# EAGLE board usb-hub-v0.2-panelize (EAGLE 6.4)
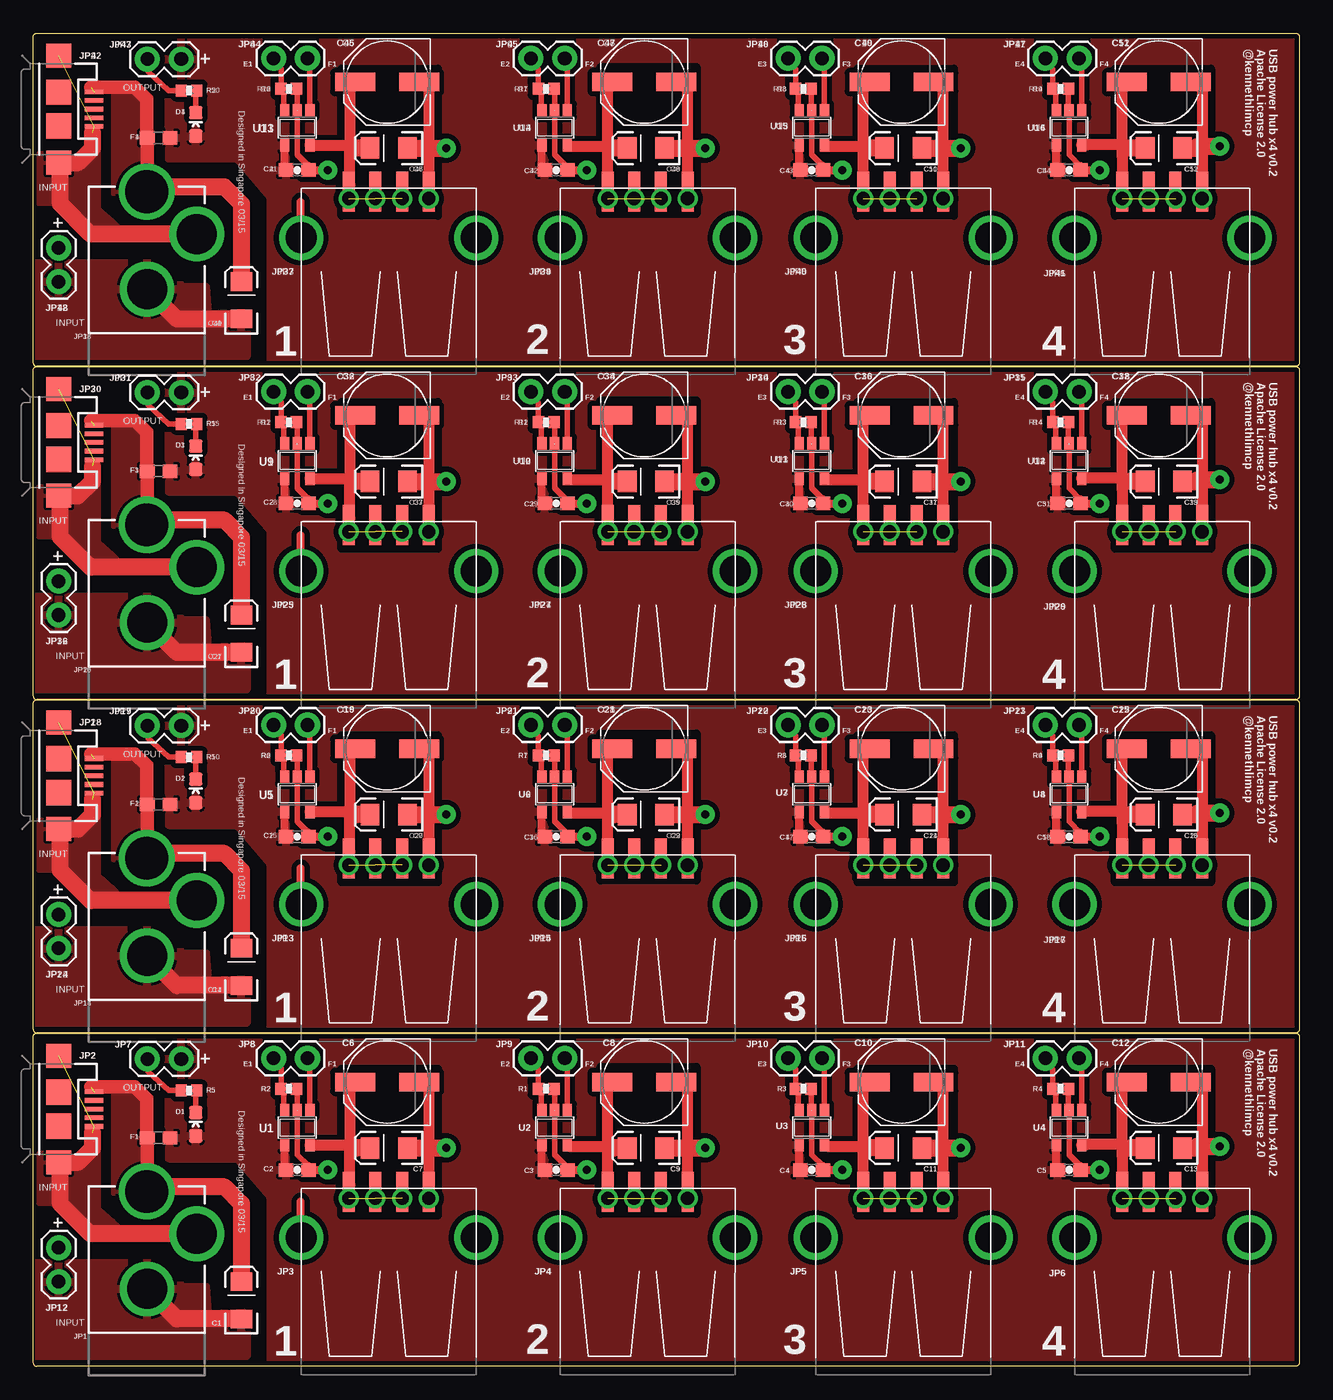
[diagram p0: board, top side]
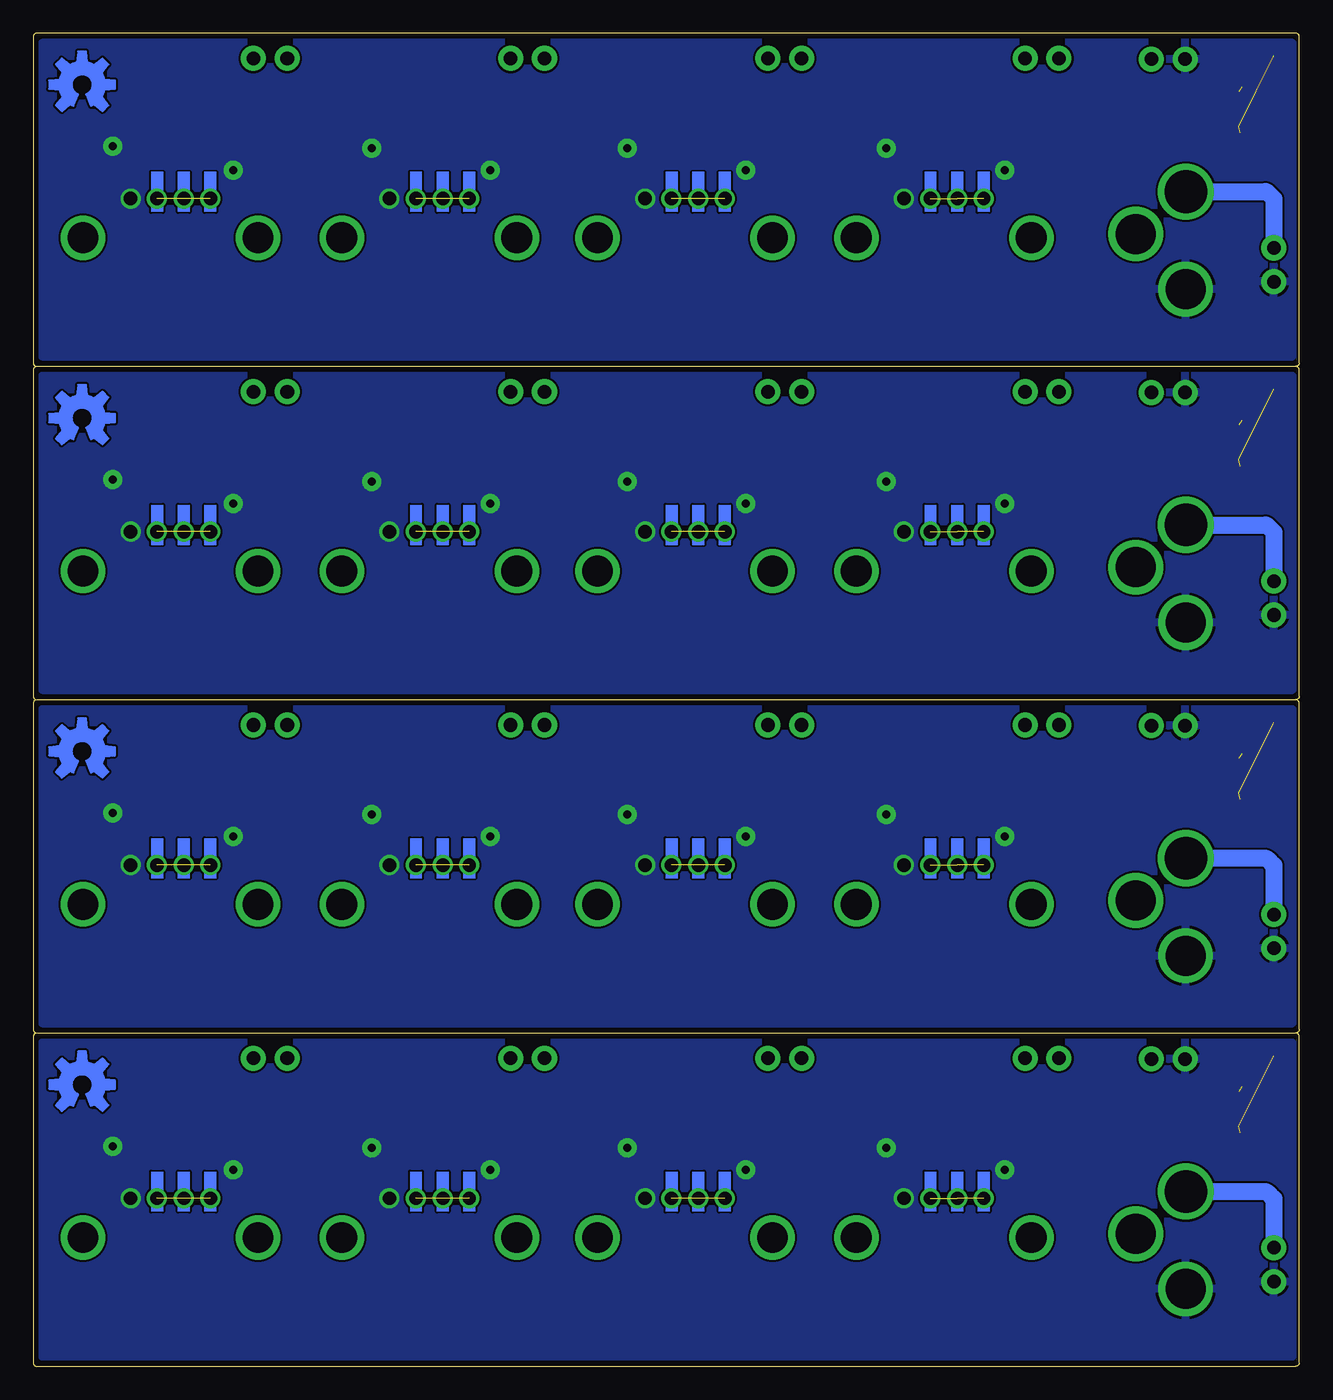
[diagram p1: board, bottom side, seen from below]

Size 95 x 100.06 mm. Coordinates in mm from the lower left corner, seen from the top.
Outline: 0,0.25 0,24.75 arc-90 0.25,25 94.75,25 arc-90 95,24.75 95,0.25 arc-90 94.75,0 0.25,0 arc-90 0,0.25
Outline: 0,25.27 0,49.77 arc-90 0.25,50.02 94.75,50.02 arc-90 95,49.77 95,25.27 arc-90 94.75,25.02 0.25,25.02 arc-90 0,25.27
Outline: 0,50.29 0,74.78 arc-90 0.25,75.04 94.75,75.04 arc-90 95,74.78 95,50.29 arc-90 94.75,50.04 0.25,50.04 arc-90 0,50.29
Outline: 0,75.31 0,99.8 arc-90 0.25,100.06 94.75,100.06 arc-90 95,99.8 95,75.31 arc-90 94.75,75.06 0.25,75.06 arc-90 0,75.31
Copper layers (1+2*15+16): Top 0.018mm / dielectric 0.195mm / Route2 0.035mm / dielectric 1.1mm / Route15 0.035mm / dielectric 0.195mm / Bottom 0.018mm
Design rules "spark-4layer": minimum track width 6mil, minimum drill 0.3mm, track to track 6mil, track to pad 6mil, pad to pad 6mil, via to via 6mil, smd to smd 6mil, copper to edge 6mil, drill to drill 6mil, minimum pad ring 12mil, minimum via ring 8mil, stop-mask expansion 4mil, vias tented up to drill 20mil, thermal gap 8mil

## Footprints (pad centres in the part's own frame; a part is rotated, then mirrored left to right if it is on the bottom)
EIA3216 = smd 1.4 x 1.6: A 1.4,0; C -1.4,0
0603-CAP = smd 1.1 x 1: 1 -0.85,0; 2 0.85,0
PANASONIC_D = smd 3 x 1.4: + 2.4,0; - -2.4,0
LED-0603 = smd 1 x 1: A 0,-0.877; C 0,0.877
0603 = smd 1.1 x 1: 1 -0.85,0; 2 0.85,0
POWER_JACK_PTH_LOCK = drill 2.997 pad 4.115: GND 0.025,6.557; GNDBREAK 3.762,10.7 | drill 3.2 pad 4.115: PWR 0,13.878
USB-MICROB = smd 0.35 x 1.4: D+ 0,2.65; D- -0.65,2.65; GND 1.3,2.65; ID 0.65,2.65; VBUS -1.3,2.65 | smd 1.8 x 1.9: MT1 -4,0; MT2 4,0 | smd 1.9 x 1.9: P$1 -1.27,0; P$2 1.27,0
USB-A-S = smd 3 x 0.9: D+ 3.45,-1; D- 3.45,1; GND 3.45,-3; VBUS 3.45,3 | drill 2.311: P$5 0,-6.566; P$6 0,6.566
1X02 = drill 1.016 pad 1.88: 1 0,0; 2 2.54,0
0402-RES = smd 0.85 x 0.9: 1 -0.58,0; 2 0.58,0
SOT23-5 = smd 0.69 x 0.99: 1 -0.95,-1.29; 2 0,-1.29; 3 0.95,-1.29; 4 0.95,1.3; 5 -0.95,1.3

## Placement (x,y rotation side)
C1  10uF  [EIA3216]  15.62,4.95 90 top
C2  1.0uF  [0603-CAP]  19.81,14.73 0 top
C3  1.0uF  [0603-CAP]  39.24,14.73 0 top
C4  1.0uF  [0603-CAP]  58.42,14.73 0 top
C5  1.0uF  [0603-CAP]  77.72,14.73 0 top
C6  150uF  [PANASONIC_D]  26.54,21.34 180 top
C7  10uF  [EIA3216]  26.67,16.38 180 top
C8  150uF  [PANASONIC_D]  45.85,21.34 180 top
C9  10uF  [EIA3216]  45.97,16.38 180 top
C10  150uF  [PANASONIC_D]  65.15,21.34 180 top
C11  10uF  [EIA3216]  65.28,16.38 180 top
C12  150uF  [PANASONIC_D]  84.45,21.34 180 top
C13  10uF  [EIA3216]  84.84,16.38 180 top
C14  10uF  [EIA3216]  15.62,29.97 90 top
C15  1.0uF  [0603-CAP]  19.81,39.75 0 top
C16  1.0uF  [0603-CAP]  39.24,39.75 0 top
C17  1.0uF  [0603-CAP]  58.42,39.75 0 top
C18  1.0uF  [0603-CAP]  77.72,39.75 0 top
C19  150uF  [PANASONIC_D]  26.54,46.35 180 top
C20  10uF  [EIA3216]  26.67,41.4 180 top
C21  150uF  [PANASONIC_D]  45.85,46.35 180 top
C22  10uF  [EIA3216]  45.97,41.4 180 top
C23  150uF  [PANASONIC_D]  65.15,46.35 180 top
C24  10uF  [EIA3216]  65.28,41.4 180 top
C25  150uF  [PANASONIC_D]  84.45,46.35 180 top
C26  10uF  [EIA3216]  84.84,41.4 180 top
C27  10uF  [EIA3216]  15.62,54.99 90 top
C28  1.0uF  [0603-CAP]  19.81,64.77 0 top
C29  1.0uF  [0603-CAP]  39.24,64.77 0 top
C30  1.0uF  [0603-CAP]  58.42,64.77 0 top
C31  1.0uF  [0603-CAP]  77.72,64.77 0 top
C32  150uF  [PANASONIC_D]  26.54,71.37 180 top
C33  10uF  [EIA3216]  26.67,66.42 180 top
C34  150uF  [PANASONIC_D]  45.85,71.37 180 top
C35  10uF  [EIA3216]  45.97,66.42 180 top
C36  150uF  [PANASONIC_D]  65.15,71.37 180 top
C37  10uF  [EIA3216]  65.28,66.42 180 top
C38  150uF  [PANASONIC_D]  84.45,71.37 180 top
C39  10uF  [EIA3216]  84.84,66.42 180 top
C40  10uF  [EIA3216]  15.62,80.01 90 top
C41  1.0uF  [0603-CAP]  19.81,89.79 0 top
C42  1.0uF  [0603-CAP]  39.24,89.79 0 top
C43  1.0uF  [0603-CAP]  58.42,89.79 0 top
C44  1.0uF  [0603-CAP]  77.72,89.79 0 top
C45  150uF  [PANASONIC_D]  26.54,96.39 180 top
C46  10uF  [EIA3216]  26.67,91.44 180 top
C47  150uF  [PANASONIC_D]  45.85,96.39 180 top
C48  10uF  [EIA3216]  45.97,91.44 180 top
C49  150uF  [PANASONIC_D]  65.15,96.39 180 top
C50  10uF  [EIA3216]  65.28,91.44 180 top
C51  150uF  [PANASONIC_D]  84.45,96.39 180 top
C52  10uF  [EIA3216]  84.84,91.44 180 top
D1  RED  [LED-0603]  12.19,18.16 0 top
D2  RED  [LED-0603]  12.19,43.18 0 top
D3  RED  [LED-0603]  12.19,68.2 0 top
D4  RED  [LED-0603]  12.19,93.22 0 top
F1  PTC0603  [0603]  9.4,17.14 0 top
F2  PTC0603  [0603]  9.4,42.16 0 top
F3  PTC0603  [0603]  9.4,67.18 0 top
F4  PTC0603  [0603]  9.4,92.2 0 top
JP1  POWER_JACKPTH_LOCK  [POWER_JACK_PTH_LOCK]  8.51,-0.76 0 top
JP2  USB-MICROB  [USB-MICROB]  1.91,19.3 270 top
JP3  USB-A-S  [USB-A-S]  26.67,9.65 90 top
JP4  USB-A-S  [USB-A-S]  46.1,9.65 90 top
JP5  USB-A-S  [USB-A-S]  65.28,9.65 90 top
JP6  USB-A-S  [USB-A-S]  84.71,9.65 90 top
JP7  [1X02]  11.1,23.06 180 top
JP8  [1X02]  18.03,23.11 0 top
JP9  [1X02]  37.34,23.11 0 top
JP10  [1X02]  56.64,23.11 0 top
JP11  [1X02]  75.95,23.11 0 top
JP12  [1X02]  1.91,8.89 270 top
JP13  USB-A-S  [USB-A-S]  26.67,34.67 90 top
JP14  POWER_JACKPTH_LOCK  [POWER_JACK_PTH_LOCK]  8.51,24.26 0 top
JP15  USB-A-S  [USB-A-S]  46.1,34.67 90 top
JP16  USB-A-S  [USB-A-S]  65.28,34.67 90 top
JP17  USB-A-S  [USB-A-S]  84.71,34.67 90 top
JP18  USB-MICROB  [USB-MICROB]  1.91,44.32 270 top
JP19  [1X02]  11.1,48.08 180 top
JP20  [1X02]  18.03,48.13 0 top
JP21  [1X02]  37.34,48.13 0 top
JP22  [1X02]  56.64,48.13 0 top
JP23  [1X02]  75.95,48.13 0 top
JP24  [1X02]  1.91,33.91 270 top
JP25  USB-A-S  [USB-A-S]  26.67,59.69 90 top
JP26  POWER_JACKPTH_LOCK  [POWER_JACK_PTH_LOCK]  8.51,49.28 0 top
JP27  USB-A-S  [USB-A-S]  46.1,59.69 90 top
JP28  USB-A-S  [USB-A-S]  65.28,59.69 90 top
JP29  USB-A-S  [USB-A-S]  84.71,59.69 90 top
JP30  USB-MICROB  [USB-MICROB]  1.91,69.34 270 top
JP31  [1X02]  11.1,73.1 180 top
JP32  [1X02]  18.03,73.15 0 top
JP33  [1X02]  37.34,73.15 0 top
JP34  [1X02]  56.64,73.15 0 top
JP35  [1X02]  75.95,73.15 0 top
JP36  [1X02]  1.91,58.93 270 top
JP37  USB-A-S  [USB-A-S]  26.67,84.71 90 top
JP38  POWER_JACKPTH_LOCK  [POWER_JACK_PTH_LOCK]  8.51,74.3 0 top
JP39  USB-A-S  [USB-A-S]  46.1,84.71 90 top
JP40  USB-A-S  [USB-A-S]  65.28,84.71 90 top
JP41  USB-A-S  [USB-A-S]  84.71,84.71 90 top
JP42  USB-MICROB  [USB-MICROB]  1.91,94.36 270 top
JP43  [1X02]  11.1,98.12 180 top
JP44  [1X02]  18.03,98.17 0 top
JP45  [1X02]  37.34,98.17 0 top
JP46  [1X02]  56.64,98.17 0 top
JP47  [1X02]  75.95,98.17 0 top
JP48  [1X02]  1.91,83.95 270 top
LOGO1  OSHW-LOGOPAD  [OSHW-LOGO-M-PAD]  91.34,21.14 0 bottom
LOGO2  OSHW-LOGOPAD  [OSHW-LOGO-M-PAD]  91.34,46.16 0 bottom
LOGO3  OSHW-LOGOPAD  [OSHW-LOGO-M-PAD]  91.34,71.17 0 bottom
LOGO4  OSHW-LOGOPAD  [OSHW-LOGO-M-PAD]  91.34,96.19 0 bottom
R1  10K  [0402-RES]  38.48,20.83 180 top
R2  10K  [0402-RES]  19.18,20.83 180 top
R3  10K  [0402-RES]  57.78,20.83 180 top
R4  10K  [0402-RES]  77.09,20.83 180 top
R5  [0402-RES]  11.68,20.7 0 top
R6  10K  [0402-RES]  19.18,45.85 180 top
R7  10K  [0402-RES]  38.48,45.85 180 top
R8  10K  [0402-RES]  57.78,45.85 180 top
R9  10K  [0402-RES]  77.09,45.85 180 top
R10  [0402-RES]  11.68,45.72 0 top
R11  10K  [0402-RES]  19.18,70.87 180 top
R12  10K  [0402-RES]  38.48,70.87 180 top
R13  10K  [0402-RES]  57.78,70.87 180 top
R14  10K  [0402-RES]  77.09,70.87 180 top
R15  [0402-RES]  11.68,70.74 0 top
R16  10K  [0402-RES]  19.18,95.89 180 top
R17  10K  [0402-RES]  38.48,95.89 180 top
R18  10K  [0402-RES]  57.78,95.89 180 top
R19  10K  [0402-RES]  77.09,95.89 180 top
R20  [0402-RES]  11.68,95.76 0 top
U1  RICHTEKRT9715AGBR  [SOT23-5]  19.81,17.91 180 top
U2  RICHTEKRT9715AGBR  [SOT23-5]  39.12,17.91 180 top
U3  RICHTEKRT9715AGBR  [SOT23-5]  58.42,17.91 180 top
U4  RICHTEKRT9715AGBR  [SOT23-5]  77.72,17.91 180 top
U5  RICHTEKRT9715AGBR  [SOT23-5]  19.81,42.93 180 top
U6  RICHTEKRT9715AGBR  [SOT23-5]  39.12,42.93 180 top
U7  RICHTEKRT9715AGBR  [SOT23-5]  58.42,42.93 180 top
U8  RICHTEKRT9715AGBR  [SOT23-5]  77.72,42.93 180 top
U9  RICHTEKRT9715AGBR  [SOT23-5]  19.81,67.94 180 top
U10  RICHTEKRT9715AGBR  [SOT23-5]  39.12,67.94 180 top
U11  RICHTEKRT9715AGBR  [SOT23-5]  58.42,67.94 180 top
U12  RICHTEKRT9715AGBR  [SOT23-5]  77.72,67.94 180 top
U13  RICHTEKRT9715AGBR  [SOT23-5]  19.81,92.96 180 top
U14  RICHTEKRT9715AGBR  [SOT23-5]  39.12,92.96 180 top
U15  RICHTEKRT9715AGBR  [SOT23-5]  58.42,92.96 180 top
U16  RICHTEKRT9715AGBR  [SOT23-5]  77.72,92.96 180 top

## Library data of the parts
C1 C7 C9 C11 C13 C14 C20 C22 C24 C26 C27 C33 C35 C37 C39 C40 C46 C48 C50 C52 = SparkFun-Capacitors; PROD_ID: CAP-00811
C2-C5 C15-C18 C28-C31 C41-C44 = SparkFun-Capacitors; PROD_ID: CAP-00868
C6 C8 C10 C12 C19 C21 C23 C25 C32 C34 C36 C38 C45 C47 C49 C51 = SparkFun-Capacitors
D1-D4 = SparkFun-LED; PROD_ID: DIO-00819
F1-F4 = SparkFun-PowerIC
JP1 JP14 JP26 JP38 = SparkFun-Connectors; PROD_ID: CONN-08197; SF_ID: PRT-00119
JP2 JP18 JP30 JP42 = SparkFun-Connectors; PROD_ID: CONN-09505
JP3-JP13 JP15-JP17 JP19-JP25 JP27-JP29 JP31-JP37 JP39-JP41 JP43-JP48 = SparkFun-Connectors
LOGO1-LOGO4 U1-U16 = kennethlimcp
R1-R20 = SparkFun-Resistors

## Nets
+5V: C2.1 C3.1 C4.1 C5.1 D1.A F1.2 JP7.1 U1.4 U2.4 U3.4 U4.4
+5V1: C15.1 C16.1 C17.1 C18.1 D2.A F2.2 JP19.1 U5.4 U6.4 U7.4 U8.4
+5V2: C28.1 C29.1 C30.1 C31.1 D3.A F3.2 JP31.1 U9.4 U10.4 U11.4 U12.4
+5V3: C41.1 C42.1 C43.1 C44.1 D4.A F4.2 JP43.1 U13.4 U14.4 U15.4 U16.4
EN1: JP8.1 R2.2 U1.3
EN2: JP9.1 R1.2 U2.3
EN3: JP10.1 R3.2 U3.3
EN4: JP11.1 R4.2 U4.3
EN5: JP20.1 R6.2 U5.3
EN6: JP22.1 R8.2 U7.3
EN7: JP23.1 R9.2 U8.3
EN8: JP21.1 R7.2 U6.3
EN9: JP32.1 R11.2 U9.3
EN10: JP34.1 R13.2 U11.3
EN11: JP35.1 R14.2 U12.3
EN12: JP33.1 R12.2 U10.3
EN13: JP44.1 R16.2 U13.3
EN14: JP46.1 R18.2 U15.3
EN15: JP47.1 R19.2 U16.3
EN16: JP45.1 R17.2 U14.3
FLAG1: JP8.2 U1.1
FLAG2: JP9.2 U2.1
FLAG3: JP10.2 U3.1
FLAG4: JP11.2 U4.1
FLAG5: JP20.2 U5.1
FLAG6: JP22.2 U7.1
FLAG7: JP23.2 U8.1
FLAG8: JP21.2 U6.1
FLAG9: JP32.2 U9.1
FLAG10: JP34.2 U11.1
FLAG11: JP35.2 U12.1
FLAG12: JP33.2 U10.1
FLAG13: JP44.2 U13.1
FLAG14: JP46.2 U15.1
FLAG15: JP47.2 U16.1
FLAG16: JP45.2 U14.1
GND: C1.C C2.2 C3.2 C4.2 C5.2 C6.- C7.C C8.- C9.C C10.- C11.C C12.- C13.C JP1.GND JP3.GND JP4.GND JP5.GND JP6.GND JP7.2 JP12.2 R1.1 R2.1 R3.1 R4.1 R5.1 U1.2 U2.2 U3.2 U4.2
GND4: C14.C C15.2 C16.2 C17.2 C18.2 C19.- C20.C C21.- C22.C C23.- C24.C C25.- C26.C JP13.GND JP14.GND JP15.GND JP16.GND JP17.GND JP19.2 JP24.2 R6.1 R7.1 R8.1 R9.1 R10.1 U5.2 U6.2 U7.2 U8.2
GND5: C27.C C28.2 C29.2 C30.2 C31.2 C32.- C33.C C34.- C35.C C36.- C37.C C38.- C39.C JP25.GND JP26.GND JP27.GND JP28.GND JP29.GND JP31.2 JP36.2 R11.1 R12.1 R13.1 R14.1 R15.1 U9.2 U10.2 U11.2 U12.2
GND6: C40.C C41.2 C42.2 C43.2 C44.2 C45.- C46.C C47.- C48.C C49.- C50.C C51.- C52.C JP37.GND JP38.GND JP39.GND JP40.GND JP41.GND JP43.2 JP48.2 R16.1 R17.1 R18.1 R19.1 R20.1 U13.2 U14.2 U15.2 U16.2
GND-ISO: JP1.GNDBREAK JP2.GND JP2.MT1 JP2.MT2
GND-ISO1: JP14.GNDBREAK JP18.GND JP18.MT1 JP18.MT2
GND-ISO2: JP26.GNDBREAK JP30.GND JP30.MT1 JP30.MT2
GND-ISO3: JP38.GNDBREAK JP42.GND JP42.MT1 JP42.MT2
INPUT: C1.A F1.1 JP1.PWR JP2.VBUS JP12.1
INPUT1: C14.A F2.1 JP14.PWR JP18.VBUS JP24.1
INPUT2: C27.A F3.1 JP26.PWR JP30.VBUS JP36.1
INPUT3: C40.A F4.1 JP38.PWR JP42.VBUS JP48.1
N$5: D1.C R5.2
N$15: D2.C R10.2
N$22: D3.C R15.2
N$29: D4.C R20.2
VOUT1: C6.+ C7.A JP3.VBUS U1.5
VOUT2: C8.+ C9.A JP4.VBUS U2.5
VOUT3: C10.+ C11.A JP5.VBUS U3.5
VOUT4: C12.+ C13.A JP6.VBUS U4.5
VOUT5: C19.+ C20.A JP13.VBUS U5.5
VOUT6: C21.+ C22.A JP15.VBUS U6.5
VOUT7: C23.+ C24.A JP16.VBUS U7.5
VOUT8: C25.+ C26.A JP17.VBUS U8.5
VOUT9: C32.+ C33.A JP25.VBUS U9.5
VOUT10: C34.+ C35.A JP27.VBUS U10.5
VOUT11: C36.+ C37.A JP28.VBUS U11.5
VOUT12: C38.+ C39.A JP29.VBUS U12.5
VOUT13: C45.+ C46.A JP37.VBUS U13.5
VOUT14: C47.+ C48.A JP39.VBUS U14.5
VOUT15: C49.+ C50.A JP40.VBUS U15.5
VOUT16: C51.+ C52.A JP41.VBUS U16.5

## Tracks (layer width: path | path; a pad name or v marks a point on that pad's centre or on a via)
+5V
  Top 0.61: C2.1 18.86,14.99 U1.4 | C4.1 57.47,14.83 U3.4 | C5.1 76.77,14.83 U4.4 | C3.1 38.17,14.96 U2.4
  pour Top (isolate 0.381): 94.57,0.51 94.8,24.77 10.08,24.79 10.16,15.62 15.37,15.62 15.37,15.49 17.78,12.7 17.78,0.38
+5V1
  Top 0.61: C15.1 18.86,40.01 U5.4 | C17.1 57.47,39.85 U7.4 | C18.1 76.77,39.85 U8.4 | C16.1 38.17,39.98 U6.4
  pour Top (isolate 0.381): 94.57,25.53 94.8,49.78 10.08,49.81 10.16,40.64 15.37,40.64 15.37,40.51 17.78,37.72 17.78,25.4
+5V2
  Top 0.61: C28.1 18.86,65.02 U9.4 | C30.1 57.47,64.87 U11.4 | C31.1 76.77,64.87 U12.4 | C29.1 38.17,65 U10.4
  pour Top (isolate 0.381): 94.57,50.55 94.8,74.8 10.08,74.83 10.16,65.66 15.37,65.66 15.37,65.53 17.78,62.74 17.78,50.42
+5V3
  Top 0.61: C41.1 18.86,90.04 U13.4 | C43.1 57.47,89.89 U15.4 | C44.1 76.77,89.89 U16.4 | C42.1 38.17,90.02 U14.4
  pour Top (isolate 0.381): 94.57,75.56 94.8,99.82 10.08,99.85 10.16,90.68 15.37,90.68 15.37,90.55 17.78,87.76 17.78,75.44
EN1
  Top 0.406: U1.3 18.8,19.26 18.8,20.83 R2.2 18.6,22.35 JP8.1
EN2
  Top 0.406: U2.3 38.1,19.26 38.1,20.76 R1.2 37.9,22.3 JP9.1
EN3
  Top 0.406: U3.3 57.4,19.26 57.4,20.38 R3.2 57.2,22.3 JP10.1
EN4
  Top 0.406: U4.3 76.71,19.26 76.71,20.38 R4.2 76.51,22.3 JP11.1
EN5
  Top 0.406: U5.3 18.8,44.28 18.8,45.85 R6.2 18.6,47.37 JP20.1
EN6
  Top 0.406: U7.3 57.4,44.28 57.4,45.39 R8.2 57.2,47.32 JP22.1
EN7
  Top 0.406: U8.3 76.71,44.28 76.71,45.39 R9.2 76.51,47.32 JP23.1
EN8
  Top 0.406: U6.3 38.1,44.28 38.1,45.77 R7.2 37.9,47.32 JP21.1
EN9
  Top 0.406: U9.3 18.8,69.3 18.8,70.87 R11.2 18.6,72.39 JP32.1
EN10
  Top 0.406: U11.3 57.4,69.3 57.4,70.41 R13.2 57.2,72.33 JP34.1
EN11
  Top 0.406: U12.3 76.71,69.3 76.71,70.41 R14.2 76.51,72.33 JP35.1
EN12
  Top 0.406: U10.3 38.1,69.3 38.1,70.79 R12.2 37.9,72.33 JP33.1
EN13
  Top 0.406: U13.3 18.8,94.32 18.8,95.89 R16.2 18.6,97.41 JP44.1
EN14
  Top 0.406: U15.3 57.4,94.32 57.4,95.43 R18.2 57.2,97.35 JP46.1
EN15
  Top 0.406: U16.3 76.71,94.32 76.71,95.43 R19.2 76.51,97.35 JP47.1
EN16
  Top 0.406: U14.3 38.1,94.32 38.1,95.81 R17.2 37.9,97.35 JP45.1
FLAG1
  Top 0.406: U1.1 20.76,22.79 JP8.2
FLAG2
  Top 0.406: U2.1 40.07,22.79 JP9.2
FLAG3
  Top 0.406: U3.1 59.37,22.79 JP10.2
FLAG4
  Top 0.406: U4.1 78.67,22.93 JP11.2
FLAG5
  Top 0.406: U5.1 20.76,47.81 JP20.2
FLAG6
  Top 0.406: U7.1 59.37,47.81 JP22.2
FLAG7
  Top 0.406: U8.1 78.67,47.95 JP23.2
FLAG8
  Top 0.406: U6.1 40.07,47.81 JP21.2
FLAG9
  Top 0.406: U9.1 20.76,72.83 JP32.2
FLAG10
  Top 0.406: U11.1 59.37,72.83 JP34.2
FLAG11
  Top 0.406: U12.1 78.67,72.96 JP35.2
FLAG12
  Top 0.406: U10.1 40.07,72.83 JP33.2
FLAG13
  Top 0.406: U13.1 20.76,97.85 JP44.2
FLAG14
  Top 0.406: U15.1 59.37,97.85 JP46.2
FLAG15
  Top 0.406: U16.1 78.67,97.98 JP47.2
FLAG16
  Top 0.406: U14.1 40.07,97.85 JP45.2
GND  (via drill 0.6 pad 1.42, 1 pad 0.6)
  Top 0.406: 40.09,14.9 39.12,15.88 U2.2 39.12,20.9 R1.1 | 78.57,15.03 77.72,15.88 U4.2 77.67,19.25 R4.1 | 59.27,15.03 58.42,15.88 U3.2 58.37,19.25 R3.1 | 20.66,15.03 19.81,15.88 U1.2 19.81,20.52 R2.1 | 87.25,16.38 87.58,16.38 arc-90 87.71,16.26 | 67.82,16.38 68.02,16.38 arc-90 68.28,16.13 | R5.1 10.16,20.7 8.64,22.1 8.64,22.99 JP7.2 | 68.07,21.34 C10.- | 87.63,21.34 C12.- | 49.02,21.34 C8.-
  Top 0.61: C6.- 29.67,21.34 | 29.21,16.38 29.72,16.38 29.72,13.15 JP3.GND | 49.1,21.26 49.02,21.34 | C3.2 40.09,14.9 40.26,14.73 v41.53,14.73 | 87.63,21.34 87.71,21.26 | C5.2 78.57,15.03 78.87,14.73 v80.01,14.73 | 68.28,21.13 68.07,21.34 | C4.2 59.27,15.03 59.44,14.73 v60.71,14.73 | 20.66,15.03 C2.2 v22.1,14.73 | 48.64,16.38 49.02,16.38 49.02,13.31 JP4.GND | 87.25,16.38 87.38,16.51 | JP6.GND 87.76,13.28 87.71,14.12 | JP5.GND 68.33,13.28
  Top 0.813: 29.67,21.34 JP3.GND | JP4.GND 49.1,21.26 | JP5.GND 68.28,16.13 68.28,21.13 | 87.71,21.26 87.71,16.26 87.71,14.12
  Top 1.27: C1.C 10.78,3.55 JP1.GND | C7.C 29.21,16.38 | 29.72,16.38 v30.99,16.38 | C9.C 48.64,16.38 | C13.C 87.25,16.38 | C11.C 67.82,16.38 v69.6,16.38 | 49.02,16.38 v50.42,16.38 | 87.38,16.51 v89.03,16.51
  other vias: 29.67,12.6 49.1,12.6 68.28,12.6 87.71,12.6
  pour Bottom: 0.51,24.29 94.33,24.29 94.33,0.73 0.51,0.73
  pour Top: 0.25,7.75 9.65,7.75 11.18,5.97 12.95,5.97 13.08,3.94 16,4.06 16,0.76 0.25,0.76
GND4  (via drill 0.6 pad 1.42, 1 pad 0.6)
  Top 0.406: 40.09,39.92 39.12,40.89 U6.2 39.12,45.92 R7.1 | 78.57,40.04 77.72,40.89 U8.2 77.67,44.27 R9.1 | 59.27,40.04 58.42,40.89 U7.2 58.37,44.27 R8.1 | 20.66,40.04 19.81,40.89 U5.2 19.81,45.54 R6.1 | 87.25,41.4 87.58,41.4 arc-90 87.71,41.27 | 67.82,41.4 68.02,41.4 arc-90 68.28,41.15 | R10.1 10.16,45.72 8.64,47.12 8.64,48.01 JP19.2 | 68.07,46.35 C23.- | 87.63,46.35 C25.- | 49.02,46.35 C21.-
  Top 0.61: C19.- 29.67,46.35 | 29.21,41.4 29.72,41.4 29.72,38.17 JP13.GND | 49.1,46.28 49.02,46.35 | C16.2 40.09,39.92 40.26,39.75 v41.53,39.75 | 87.63,46.35 87.71,46.28 | C18.2 78.57,40.04 78.87,39.75 v80.01,39.75 | 68.28,46.15 68.07,46.35 | C17.2 59.27,40.04 59.44,39.75 v60.71,39.75 | 20.66,40.04 C15.2 v22.1,39.75 | 48.64,41.4 49.02,41.4 49.02,38.33 JP15.GND | 87.25,41.4 87.38,41.53 | JP17.GND 87.76,38.3 87.71,39.14 | JP16.GND 68.33,38.3
  Top 0.813: 29.67,46.35 JP13.GND | JP15.GND 49.1,46.28 | JP16.GND 68.28,41.15 68.28,46.15 | 87.71,46.28 87.71,41.27 87.71,39.14
  Top 1.27: C14.C 10.78,28.57 JP14.GND | C20.C 29.21,41.4 | 29.72,41.4 v30.99,41.4 | C22.C 48.64,41.4 | C26.C 87.25,41.4 | C24.C 67.82,41.4 v69.6,41.4 | 49.02,41.4 v50.42,41.4 | 87.38,41.53 v89.03,41.53
  other vias: 29.67,37.62 49.1,37.62 68.28,37.62 87.71,37.62
  pour Bottom: 0.51,49.31 94.33,49.31 94.33,25.75 0.51,25.75
  pour Top: 0.25,32.77 9.65,32.77 11.18,30.99 12.95,30.99 13.08,28.96 16,29.08 16,25.78 0.25,25.78
GND5  (via drill 0.6 pad 1.42, 1 pad 0.6)
  Top 0.406: 40.09,64.94 39.12,65.91 U10.2 39.12,70.94 R12.1 | 78.57,65.06 77.72,65.91 U12.2 77.67,69.29 R14.1 | 59.27,65.06 58.42,65.91 U11.2 58.37,69.29 R13.1 | 20.66,65.06 19.81,65.91 U9.2 19.81,70.56 R11.1 | 87.25,66.42 87.58,66.42 arc-90 87.71,66.29 | 67.82,66.42 68.02,66.42 arc-90 68.28,66.17 | R15.1 10.16,70.74 8.64,72.14 8.64,73.03 JP31.2 | 68.07,71.37 C36.- | 87.63,71.37 C38.- | 49.02,71.37 C34.-
  Top 0.61: C32.- 29.67,71.37 | 29.21,66.42 29.72,66.42 29.72,63.19 JP25.GND | 49.1,71.3 49.02,71.37 | C29.2 40.09,64.94 40.26,64.77 v41.53,64.77 | 87.63,71.37 87.71,71.3 | C31.2 78.57,65.06 78.87,64.77 v80.01,64.77 | 68.28,71.17 68.07,71.37 | C30.2 59.27,65.06 59.44,64.77 v60.71,64.77 | 20.66,65.06 C28.2 v22.1,64.77 | 48.64,66.42 49.02,66.42 49.02,63.35 JP27.GND | 87.25,66.42 87.38,66.55 | JP29.GND 87.76,63.31 87.71,64.16 | JP28.GND 68.33,63.31
  Top 0.813: 29.67,71.37 JP25.GND | JP27.GND 49.1,71.3 | JP28.GND 68.28,66.17 68.28,71.17 | 87.71,71.3 87.71,66.29 87.71,64.16
  Top 1.27: C27.C 10.78,53.59 JP26.GND | C33.C 29.21,66.42 | 29.72,66.42 v30.99,66.42 | C35.C 48.64,66.42 | C39.C 87.25,66.42 | C37.C 67.82,66.42 v69.6,66.42 | 49.02,66.42 v50.42,66.42 | 87.38,66.55 v89.03,66.55
  other vias: 29.67,62.64 49.1,62.64 68.28,62.64 87.71,62.64
  pour Bottom: 0.51,74.33 94.33,74.33 94.33,50.77 0.51,50.77
  pour Top: 0.25,57.78 9.65,57.78 11.18,56.01 12.95,56.01 13.08,53.98 16,54.1 16,50.8 0.25,50.8
GND6  (via drill 0.6 pad 1.42, 1 pad 0.6)
  Top 0.406: 40.09,89.95 39.12,90.93 U14.2 39.12,95.96 R17.1 | 78.57,90.08 77.72,90.93 U16.2 77.67,94.31 R19.1 | 59.27,90.08 58.42,90.93 U15.2 58.37,94.31 R18.1 | 20.66,90.08 19.81,90.93 U13.2 19.81,95.58 R16.1 | 87.25,91.44 87.58,91.44 arc-90 87.71,91.31 | 67.82,91.44 68.02,91.44 arc-90 68.28,91.19 | R20.1 10.16,95.76 8.64,97.16 8.64,98.04 JP43.2 | 68.07,96.39 C49.- | 87.63,96.39 C51.- | 49.02,96.39 C47.-
  Top 0.61: C45.- 29.67,96.39 | 29.21,91.44 29.72,91.44 29.72,88.21 JP37.GND | 49.1,96.31 49.02,96.39 | C42.2 40.09,89.95 40.26,89.79 v41.53,89.79 | 87.63,96.39 87.71,96.31 | C44.2 78.57,90.08 78.87,89.79 v80.01,89.79 | 68.28,96.19 68.07,96.39 | C43.2 59.27,90.08 59.44,89.79 v60.71,89.79 | 20.66,90.08 C41.2 v22.1,89.79 | 48.64,91.44 49.02,91.44 49.02,88.36 JP39.GND | 87.25,91.44 87.38,91.57 | JP41.GND 87.76,88.33 87.71,89.18 | JP40.GND 68.33,88.33
  Top 0.813: 29.67,96.39 JP37.GND | JP39.GND 49.1,96.31 | JP40.GND 68.28,91.19 68.28,96.19 | 87.71,96.31 87.71,91.31 87.71,89.18
  Top 1.27: C40.C 10.78,78.61 JP38.GND | C46.C 29.21,91.44 | 29.72,91.44 v30.99,91.44 | C48.C 48.64,91.44 | C52.C 87.25,91.44 | C50.C 67.82,91.44 v69.6,91.44 | 49.02,91.44 v50.42,91.44 | 87.38,91.57 v89.03,91.57
  other vias: 29.67,87.66 49.1,87.66 68.28,87.66 87.71,87.66
  pour Bottom: 0.51,99.35 94.33,99.35 94.33,75.79 0.51,75.79
  pour Top: 0.25,82.8 9.65,82.8 11.18,81.03 12.95,81.03 13.08,78.99 16,79.12 16,75.82 0.25,75.82
GND-ISO  (2 unrouted)
  Top 1.016: 2.03,15.18 JP2.MT2
  Top 1.27: JP1.GNDBREAK 4.29,9.94 2.03,12.19 2.03,15.18 | JP2.MT2 3.37,15.3 4.45,16.38 4.45,17.53
  pour Top: 12.45,9.53 12.45,10.29 12.32,10.41 6.48,10.41 5.97,10.92 4.95,11.81 4.95,16.13 3.68,16.13 3.17,15.62 2.79,16 0.38,16 0.38,12.19 1.4,12.19 4.06,9.53
GND-ISO1  (2 unrouted)
  Top 1.016: 2.03,40.2 JP18.MT2
  Top 1.27: JP14.GNDBREAK 4.29,34.96 2.03,37.21 2.03,40.2 | JP18.MT2 3.37,40.32 4.45,41.4 4.45,42.55
  pour Top: 12.45,34.54 12.45,35.31 12.32,35.43 6.48,35.43 5.97,35.94 4.95,36.83 4.95,41.15 3.68,41.15 3.17,40.64 2.79,41.02 0.38,41.02 0.38,37.21 1.4,37.21 4.06,34.54
GND-ISO2  (2 unrouted)
  Top 1.016: 2.03,65.22 JP30.MT2
  Top 1.27: JP26.GNDBREAK 4.29,59.98 2.03,62.23 2.03,65.22 | JP30.MT2 3.37,65.34 4.45,66.42 4.45,67.56
  pour Top: 12.45,59.56 12.45,60.33 12.32,60.45 6.48,60.45 5.97,60.96 4.95,61.85 4.95,66.17 3.68,66.17 3.17,65.66 2.79,66.04 0.38,66.04 0.38,62.23 1.4,62.23 4.06,59.56
GND-ISO3  (2 unrouted)
  Top 1.016: 2.03,90.23 JP42.MT2
  Top 1.27: JP38.GNDBREAK 4.29,85 2.03,87.25 2.03,90.23 | JP42.MT2 3.37,90.36 4.45,91.44 4.45,92.58
  pour Top: 12.45,84.58 12.45,85.34 12.32,85.47 6.48,85.47 5.97,85.98 4.95,86.87 4.95,91.19 3.68,91.19 3.17,90.68 2.79,91.06 0.38,91.06 0.38,87.25 1.4,87.25 4.06,84.58
INPUT  (1 unrouted)
  Top 0.406: 8.51,17.11 F1.1
  Top 1.016: F1.1 8.55,13.15 JP1.PWR | 4.32,20.95 7.62,20.95 8.51,20.07 8.51,17.11
  Top 1.27: JP1.PWR 8.86,13.46 14.35,13.46 15.62,12.19 C1.A
  Bottom 1.016: 2.55,13.12 arc45 2.37,13.04
  Bottom 1.27: JP1.PWR 2.55,13.12 | 2.37,13.04 1.91,12.57 JP12.1
  pour Top: 5.97,21.21 5.97,12.95 8.89,12.95 8.89,20.19 7.75,21.21
INPUT1  (1 unrouted)
  Top 0.406: 8.51,42.12 F2.1
  Top 1.016: F2.1 8.55,38.17 JP14.PWR | 4.32,45.97 7.62,45.97 8.51,45.09 8.51,42.12
  Top 1.27: JP14.PWR 8.86,38.48 14.35,38.48 15.62,37.21 C14.A
  Bottom 1.016: 2.55,38.13 arc45 2.37,38.06
  Bottom 1.27: JP14.PWR 2.55,38.13 | 2.37,38.06 1.91,37.59 JP24.1
  pour Top: 5.97,46.23 5.97,37.97 8.89,37.97 8.89,45.21 7.75,46.23
INPUT2  (1 unrouted)
  Top 0.406: 8.51,67.14 F3.1
  Top 1.016: F3.1 8.55,63.19 JP26.PWR | 4.32,70.99 7.62,70.99 8.51,70.1 8.51,67.14
  Top 1.27: JP26.PWR 8.86,63.5 14.35,63.5 15.62,62.23 C27.A
  Bottom 1.016: 2.55,63.15 arc45 2.37,63.08
  Bottom 1.27: JP26.PWR 2.55,63.15 | 2.37,63.08 1.91,62.61 JP36.1
  pour Top: 5.97,71.25 5.97,62.99 8.89,62.99 8.89,70.23 7.75,71.25
INPUT3  (1 unrouted)
  Top 0.406: 8.51,92.16 F4.1
  Top 1.016: F4.1 8.55,88.21 JP38.PWR | 4.32,96.01 7.62,96.01 8.51,95.12 8.51,92.16
  Top 1.27: JP38.PWR 8.86,88.52 14.35,88.52 15.62,87.25 C40.A
  Bottom 1.016: 2.55,88.17 arc45 2.37,88.1
  Bottom 1.27: JP38.PWR 2.55,88.17 | 2.37,88.1 1.91,87.63 JP48.1
  pour Top: 5.97,96.27 5.97,88.01 8.89,88.01 8.89,95.25 7.75,96.27
N$1
  cutout Top (no thermals): 42.55,22.48 49.78,22.48 49.78,11.43 42.55,11.43
  cutout Top (no thermals): 23.11,22.35 30.35,22.35 30.35,11.3 23.11,11.3
  cutout Top (no thermals): 61.85,22.35 69.09,22.35 69.09,11.3 61.85,11.3
  cutout Top (no thermals): 81.15,22.35 88.39,22.35 88.39,11.3 81.15,11.3
N$2  (via drill 1 pad 0.6)  (2 unrouted)
  other vias: 81.71,12.6 83.69,12.6 85.72,12.6
N$3  (via drill 1 pad 0.6)  (2 unrouted)
  other vias: 43.1,12.6 45.09,12.6 47.12,12.6
N$4  (via drill 1 pad 0.6)  (2 unrouted)
  other vias: 62.28,12.6 64.26,12.6 66.29,12.6
N$5
  Top 0.406: D1.C 12.19,20.5 R5.2
N$6  (via drill 1 pad 0.6)  (2 unrouted)
  other vias: 23.67,12.6 25.65,12.6 27.69,12.6
N$7
  cutout Top (no thermals): 42.55,47.5 49.78,47.5 49.78,36.45 42.55,36.45
  cutout Top (no thermals): 23.11,47.37 30.35,47.37 30.35,36.32 23.11,36.32
  cutout Top (no thermals): 61.85,47.37 69.09,47.37 69.09,36.32 61.85,36.32
  cutout Top (no thermals): 81.15,47.37 88.39,47.37 88.39,36.32 81.15,36.32
N$9  (via drill 1 pad 0.6)  (2 unrouted)
  other vias: 23.67,37.62 25.65,37.62 27.69,37.62
N$10
  Top 0.61: 20.07,9.65 20.07,12.35
N$11
  Top 0.61: 20.07,34.67 20.07,37.37
N$12  (via drill 1 pad 0.6)  (2 unrouted)
  other vias: 81.71,37.62 83.69,37.62 85.72,37.62
N$13  (via drill 1 pad 0.6)  (2 unrouted)
  other vias: 43.1,37.62 45.09,37.62 47.12,37.62
N$14  (via drill 1 pad 0.6)  (2 unrouted)
  other vias: 62.28,37.62 64.26,37.62 66.29,37.62
N$15
  Top 0.406: D2.C 12.19,45.52 R10.2
N$16
  cutout Top (no thermals): 42.55,72.52 49.78,72.52 49.78,61.47 42.55,61.47
  cutout Top (no thermals): 23.11,72.39 30.35,72.39 30.35,61.34 23.11,61.34
  cutout Top (no thermals): 61.85,72.39 69.09,72.39 69.09,61.34 61.85,61.34
  cutout Top (no thermals): 81.15,72.39 88.39,72.39 88.39,61.34 81.15,61.34
N$17  (via drill 1 pad 0.6)  (2 unrouted)
  other vias: 23.67,62.64 25.65,62.64 27.69,62.64
N$18
  Top 0.61: 20.07,59.69 20.07,62.39
N$19  (via drill 1 pad 0.6)  (2 unrouted)
  other vias: 81.71,62.64 83.69,62.64 85.72,62.64
N$20  (via drill 1 pad 0.6)  (2 unrouted)
  other vias: 43.1,62.64 45.09,62.64 47.12,62.64
N$21  (via drill 1 pad 0.6)  (2 unrouted)
  other vias: 62.28,62.64 64.26,62.64 66.29,62.64
N$22
  Top 0.406: D3.C 12.19,70.54 R15.2
N$23
  cutout Top (no thermals): 42.55,97.54 49.78,97.54 49.78,86.49 42.55,86.49
  cutout Top (no thermals): 23.11,97.41 30.35,97.41 30.35,86.36 23.11,86.36
  cutout Top (no thermals): 61.85,97.41 69.09,97.41 69.09,86.36 61.85,86.36
  cutout Top (no thermals): 81.15,97.41 88.39,97.41 88.39,86.36 81.15,86.36
N$24  (via drill 1 pad 0.6)  (2 unrouted)
  other vias: 23.67,87.66 25.65,87.66 27.69,87.66
N$25
  Top 0.61: 20.07,84.71 20.07,87.41
N$26  (via drill 1 pad 0.6)  (2 unrouted)
  other vias: 81.71,87.66 83.69,87.66 85.72,87.66
N$27  (via drill 1 pad 0.6)  (2 unrouted)
  other vias: 43.1,87.66 45.09,87.66 47.12,87.66
N$28  (via drill 1 pad 0.6)  (2 unrouted)
  other vias: 62.28,87.66 64.26,87.66 66.29,87.66
N$29
  Top 0.406: D4.C 12.19,95.56 R20.2
VOUT1
  Top 0.61: JP3.VBUS 23.75,13.61 | C6.+ 23.75,21.34 | 23.75,16.61 23.97,16.38 24.26,16.38
  Top 0.813: 23.75,13.61 23.75,16.61 | 23.75,21.34 23.75,16.61 | U1.5 23.75,16.61
  Top 1.27: C7.A 24.26,16.38
VOUT2
  Top 0.61: 43.1,20.99 C8.+ | U2.5 40.16,16.51 | 43.1,16.51 43.23,16.38 43.56,16.38
  Top 0.813: JP4.VBUS 43.1,16.51 | 43.1,16.51 43.1,20.99 | 40.16,16.51 43.1,16.51
  Top 1.27: C9.A 43.56,16.38
VOUT3
  Top 0.61: 62.28,20.86 C10.+ | U3.5 59.59,16.51 | C11.A 62.23,16.51 62.23,13.28 JP5.VBUS
  Top 0.813: JP5.VBUS 62.28,20.86 | 59.59,16.51 62.23,16.51
  Top 1.27: C11.A 62.74,16.38
VOUT4
  Top 0.61: 81.71,20.99 C12.+ | 82.3,16.38 81.71,15.8
  Top 0.813: 81.71,20.99 81.71,15.8 JP6.VBUS | 82.3,16.38 81.79,16.38 81.79,16.64 79.06,16.64 U4.5
  Top 1.27: C13.A 82.3,16.38
VOUT5
  Top 0.61: JP13.VBUS 23.75,38.63 | C19.+ 23.75,46.35 | 23.75,41.63 23.97,41.4 24.26,41.4
  Top 0.813: 23.75,38.63 23.75,41.63 | 23.75,46.35 23.75,41.63 | U5.5 23.75,41.63
  Top 1.27: C20.A 24.26,41.4
VOUT6
  Top 0.61: 43.1,46.01 C21.+ | U6.5 40.16,41.53 | 43.1,41.53 43.23,41.4 43.56,41.4
  Top 0.813: JP15.VBUS 43.1,41.53 | 43.1,41.53 43.1,46.01 | 40.16,41.53 43.1,41.53
  Top 1.27: C22.A 43.56,41.4
VOUT7
  Top 0.61: 62.28,45.88 C23.+ | U7.5 59.59,41.53 | C24.A 62.23,41.53 62.23,38.3 JP16.VBUS
  Top 0.813: JP16.VBUS 62.28,45.88 | 59.59,41.53 62.23,41.53
  Top 1.27: C24.A 62.74,41.4
VOUT8
  Top 0.61: 81.71,46.01 C25.+ | 82.3,41.4 81.71,40.81
  Top 0.813: 81.71,46.01 81.71,40.81 JP17.VBUS | 82.3,41.4 81.79,41.4 81.79,41.66 79.06,41.66 U8.5
  Top 1.27: C26.A 82.3,41.4
VOUT9
  Top 0.61: JP25.VBUS 23.75,63.65 | C32.+ 23.75,71.37 | 23.75,66.64 23.97,66.42 24.26,66.42
  Top 0.813: 23.75,63.65 23.75,66.64 | 23.75,71.37 23.75,66.64 | U9.5 23.75,66.64
  Top 1.27: C33.A 24.26,66.42
VOUT10
  Top 0.61: 43.1,71.03 C34.+ | U10.5 40.16,66.55 | 43.1,66.55 43.23,66.42 43.56,66.42
  Top 0.813: JP27.VBUS 43.1,66.55 | 43.1,66.55 43.1,71.03 | 40.16,66.55 43.1,66.55
  Top 1.27: C35.A 43.56,66.42
VOUT11
  Top 0.61: 62.28,70.9 C36.+ | U11.5 59.59,66.55 | C37.A 62.23,66.55 62.23,63.31 JP28.VBUS
  Top 0.813: JP28.VBUS 62.28,70.9 | 59.59,66.55 62.23,66.55
  Top 1.27: C37.A 62.74,66.42
VOUT12
  Top 0.61: 81.71,71.03 C38.+ | 82.3,66.42 81.71,65.83
  Top 0.813: 81.71,71.03 81.71,65.83 JP29.VBUS | 82.3,66.42 81.79,66.42 81.79,66.67 79.06,66.67 U12.5
  Top 1.27: C39.A 82.3,66.42
VOUT13
  Top 0.61: JP37.VBUS 23.75,88.67 | C45.+ 23.75,96.39 | 23.75,91.66 23.97,91.44 24.26,91.44
  Top 0.813: 23.75,88.67 23.75,91.66 | 23.75,96.39 23.75,91.66 | U13.5 23.75,91.66
  Top 1.27: C46.A 24.26,91.44
VOUT14
  Top 0.61: 43.1,96.05 C47.+ | U14.5 40.16,91.57 | 43.1,91.57 43.23,91.44 43.56,91.44
  Top 0.813: JP39.VBUS 43.1,91.57 | 43.1,91.57 43.1,96.05 | 40.16,91.57 43.1,91.57
  Top 1.27: C48.A 43.56,91.44
VOUT15
  Top 0.61: 62.28,95.92 C49.+ | U15.5 59.59,91.57 | C50.A 62.23,91.57 62.23,88.33 JP40.VBUS
  Top 0.813: JP40.VBUS 62.28,95.92 | 59.59,91.57 62.23,91.57
  Top 1.27: C50.A 62.74,91.44
VOUT16
  Top 0.61: 81.71,96.05 C51.+ | 82.3,91.44 81.71,90.85
  Top 0.813: 81.71,96.05 81.71,90.85 JP41.VBUS | 82.3,91.44 81.79,91.44 81.79,91.69 79.06,91.69 U16.5
  Top 1.27: C52.A 82.3,91.44
(copper drawn outside any net)
  shapes: Bottom area x48

## Text on the board
tNames: USB power hub x4 v0.2 / Apache License 2.0 / @kennethlimcp | + | E1 | F1 | E2 | F2 | E3 | F3 | E4 | F4 | OUTPUT | Designed in Singapore 03/15 | INPUT | + | INPUT | 1 | 2 | 3 | 4 | USB power hub x4 v0.2 / Apache License 2.0 / @kennethlimcp | + | E1 | F1 | E2 | F2 | E3 | F3 | E4 | F4 | OUTPUT | Designed in Singapore 03/15 | INPUT | + | INPUT | 1 | 2 | 3 | 4 | USB power hub x4 v0.2 / Apache License 2.0 / @kennethlimcp | + | E1 | F1 | E2 | F2 | E3 | F3 | E4 | F4 | OUTPUT | Designed in Singapore 03/15 | INPUT | + | INPUT | 1 | 2 | 3 | 4 | USB power hub x4 v0.2 / Apache License 2.0 / @kennethlimcp | + | E1 | F1 | E2 | F2 | E3 | F3 | E4 | F4 | OUTPUT | Designed in Singapore 03/15 | INPUT | + | INPUT | 1 | 2 | 3 | 4
_tNames: C6 | C8 | C10 | C12 | JP7 | JP8 | JP9 | JP10 | JP11 | JP2 | R5 | R2 | R1 | R3 | R4 | D1 | U1 | U2 | U3 | U4 | F1 | C2 | C7 | C3 | C9 | C4 | C11 | C5 | C13 | JP3 | JP4 | JP5 | JP6 | JP12 | C1 | JP1 | C6 | C8 | C10 | C12 | JP7 | JP8 | JP9 | JP10 | JP11 | JP2 | R5 | R2 | R1 | R3 | R4 | D1 | U1 | U2 | U3 | U4 | F1 | C2 | C7 | C3 | C9 | C4 | C11 | C5 | C13 | JP3 | JP4 | JP5 | JP6 | JP12 | C1 | JP1 | C6 | C8 | C10 | C12 | JP7 | JP8 | JP9 | JP10 | JP11 | JP2 | R5 | R2 | R1 | R3 | R4 | D1 | U1 | U2 | U3 | U4 | F1 | C2 | C7 | C9 | C11 | C13 | C3 | C4 | C5 | JP3 | JP4 | JP5 | JP6 | JP12 | C1 | JP1 | C6 | C8 | C10 | C12 | JP7 | JP8 | JP9 | JP10 | JP11 | JP2 | R5 | R2 | R1 | R3 | R4 | D1 | U1 | U2 | U3 | U4 | F1 | C2 | C7 | C9 | C11 | C13 | C3 | C4 | C5 | JP3 | JP4 | JP5 | JP6 | JP12 | C1 | JP1